# EAGLE board V1_Encoder (EAGLE 5.11)
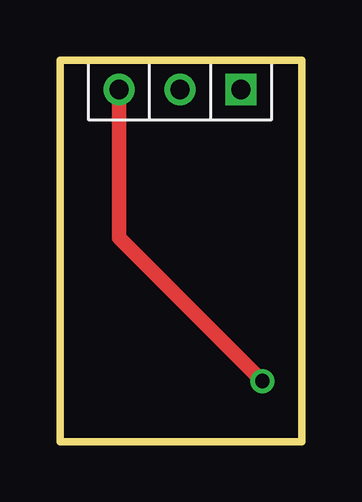
[diagram p0: board, top side]
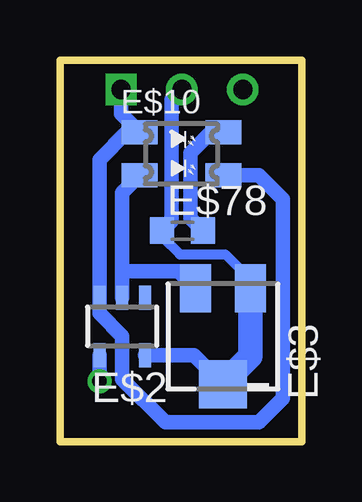
[diagram p1: board, bottom side, seen from below]

Size 10.1 x 15.9 mm. Coordinates in mm from the lower left corner, seen from the top.
Outline: 0,15.9 10.1,15.9 10.1,2.8 10.1,0 0,0 0,15.9
Copper layers (1*16): Top 0.035mm / dielectric 1.5mm / Bottom 0.035mm
Design rules "default": minimum track width 10mil, minimum drill 24mil, track to track 8mil, track to pad 8mil, pad to pad 8mil, via to via 8mil, smd to smd 8mil, copper to edge 40mil, drill to drill 8mil, minimum pad ring 10mil, minimum via ring 8mil, stop-mask expansion 4mil, vias tented up to drill 0mil, thermal gap 10mil

## Footprints (pad centres in the part's own frame; a part is rotated, then mirrored left to right if it is on the bottom)
SOT23-5 = smd 0.5 x 1: 1 -0.95,-1.2; 2 0,-1.2; 3 0.95,-1.2; 4 0.95,1.2; 5 -0.95,1.2
SM-42/43A = smd 2 x 1.3: 1 2,1.15; 3 2,-1.15 | smd 2 x 2: 2 -2,0
3_PINES_HEMBRA = drill 0.8 square: P$1 0,0 | drill 0.8 round: P$2 2.54,0; P$3 5.08,0
HSMFC655 = smd 1.5 x 1: A-GRN -1.75,0.9; A-RED -1.75,-0.9; K-GRN 1.75,0.9; K-RED 1.75,-0.9
R0603 = smd 1 x 1.1: 1 -0.85,0; 2 0.85,0

## Placement (x,y rotation side)
E$2  [SOT23-5]  7.5,4.8 180 bottom
E$3  [SM-42/43A]  3.3,4.4 90 bottom
E$4  [3_PINES_HEMBRA]  7.55,14.67 180 top
E$10  [HSMFC655]  5.03,11.99 0 bottom
E$78  [R0603]  4.99,8.79 0 bottom

## Library data of the parts
E$2 = zetex
E$3 = pot
E$4 = Robot
E$10 = opto-transmittter-hp
E$78 = smd-ipc

## Nets
S$1: E$10.K-GRN E$78.2
S$2: E$2.4 E$4.P$3
S$3: E$2.5 E$3.2 E$3.3 E$4.P$2 E$78.1
S$4: E$2.3 E$4.P$1 E$10.A-GRN E$10.K-RED
S$6: E$2.2 E$3.1 E$10.A-RED

## Tracks (layer width: path | path; a pad name or v marks a point on that pad's centre or on a via)
S$1
  Bottom 0.61: E$10.K-GRN 3.79,12.89 4.65,12.03 4.65,9.3 E$78.2
S$2  (via drill 0.6)
  Top 0.61: E$4.P$3 2.47,8.5 v8.45,2.52
  Bottom 0.61: v8.45,2.52 E$2.4
S$3
  Bottom 0.406: E$3.3 2.15,6.75 3.2,7.8 5.1,7.8 5.84,8.54 E$78.1
  Bottom 0.61: E$3.2 4.5,3.6 E$2.5 | E$4.P$2 5.44,14.24 5.44,9.19 E$78.1
  Bottom 1.016: E$3.2 2.15,3.55 E$3.3
S$4
  Bottom 0.61: E$10.K-RED 1.8,11.09 0.8,10.09 0.8,1.8 1.8,0.8 5.7,0.8 7.5,2.6 7.5,4.4 8.45,5.35 E$2.3 8.45,11.75 7.31,12.89 E$10.A-GRN 7.55,13.66 E$4.P$1
S$6
  Bottom 0.61: E$2.2 7.5,7.1 | 7.5,7.1 7.5,10.37 E$10.A-RED | E$3.1 5.15,7.1 7.5,7.1